# EAGLE board 00 (EAGLE 8.7.1)

Size 100 x 80 mm. Coordinates in mm from the lower left corner, seen from the top.
Outline: 0,0 100,0 100,80 0,80 0,0
Copper layers (1*16): Top 0.035mm / dielectric 1.5mm / Bottom 0.035mm
Design rules "default": minimum track width 6mil, minimum drill 0.35mm, track to track 6mil, track to pad 6mil, pad to pad 6mil, via to via 6mil, smd to smd 6mil, copper to edge 40mil, drill to drill 6mil, minimum pad ring 10mil, minimum via ring 8mil, stop-mask expansion 4mil, vias tented up to drill 0mil, thermal gap 10mil

## Footprints (pad centres in the part's own frame; a part is rotated, then mirrored left to right if it is on the bottom)
C025-025X050 = drill 0.813 octagon: 1 -1.27,0; 2 1.27,0
B45181B = drill 0.813: + -2.54,0 | drill 0.813 octagon: - 2.54,0
USB-MB-H = drill 0.8: D+ 5.1,0; D- 3.9,0.8; GND 5.1,-1.6; ID 3.9,-0.8; VBUS 5.1,1.6 | drill 1.9: P$6 0,-3.65; P$7 0,3.65
1X08 = drill 1.016 pad 1.88: 1 0,0; 2 2.54,0; 3 5.08,0; 4 7.62,0; 5 10.16,0; 6 12.7,0; 7 15.24,0; 8 17.78,0
LED3MM = drill 0.813 octagon: A -1.27,0; K 1.27,0
0207/10 = drill 0.813 octagon: 1 -5.08,0; 2 5.08,0
DIL28-3 = drill 0.813 long: 1 -16.51,-3.81; 2 -13.97,-3.81; 3 -11.43,-3.81; 4 -8.89,-3.81; 5 -6.35,-3.81; 6 -3.81,-3.81; 7 -1.27,-3.81; 8 1.27,-3.81; 9 3.81,-3.81; 10 6.35,-3.81; 11 8.89,-3.81; 12 11.43,-3.81; 13 13.97,-3.81; 14 16.51,-3.81; 15 16.51,3.81; 16 13.97,3.81; 17 11.43,3.81; 18 8.89,3.81; 19 6.35,3.81; 20 3.81,3.81; 21 1.27,3.81; 22 -1.27,3.81; 23 -3.81,3.81; 24 -6.35,3.81; 25 -8.89,3.81; 26 -11.43,3.81; 27 -13.97,3.81; 28 -16.51,3.81
SLIDE = drill 0.8: 1 -2,0; 2 0,0; 3 2,0 | drill 1: P$1 -4,0; P$2 4,0
TO92 = drill 0.813 octagon: 1 -1.27,0; 2 0,1.905; 3 1.27,0
PB = drill 1.016 pad 1.88: 1 -2.54,0; 2 2.54,0
1X05 = drill 1.016 pad 1.88: 1 0,0; 2 2.54,0; 3 5.08,0; 4 7.62,0; 5 10.16,0
OSC = drill 1.016 pad 1.88: 1 -2.54,0; 2 0,0; 3 2.54,0

## Placement (x,y rotation side)
C1  0.1uF  [C025-025X050]  -33.02,26.67 0 top  (outside the outline)
C2  0.1uF  [C025-025X050]  -39.37,26.67 0 top  (outside the outline)
C3  0.1uF  [C025-025X050]  -45.72,26.67 0 top  (outside the outline)
C4  0.1uF  [C025-025X050]  -52.07,26.67 0 top  (outside the outline)
C5  10uF  [B45181B]  -34.29,15.24 0 top  (outside the outline)
C6  10uF  [B45181B]  -46.99,15.24 0 top  (outside the outline)
J1  USB-MB-H  [USB-MB-H]  -21.59,17.78 0 top  (outside the outline)
J2  [1X08]  -52.07,48.26 0 top  (outside the outline)
J3  [1X08]  -31.75,53.34 0 top  (outside the outline)
LED1  Red  [LED3MM]  -30.48,49.53 0 top  (outside the outline)
LED2  Green  [LED3MM]  -20.32,49.53 0 top  (outside the outline)
R1  330  [0207/10]  -43.18,38.1 0 top  (outside the outline)
R2  330  [0207/10]  -19.05,43.18 0 top  (outside the outline)
R3  10K  [0207/10]  -31.75,43.18 0 top  (outside the outline)
R4  10K  [0207/10]  -44.45,43.18 0 top  (outside the outline)
U$1  PIC32MX250F128B  [DIL28-3]  -31.75,6.35 0 top  (outside the outline)
U$2  SLIDE  [SLIDE]  -24.13,25.4 0 top  (outside the outline)
U$3  MCP1702  [TO92]  -34.29,38.1 0 top  (outside the outline)
U$4  RESET  [PB]  -20.32,33.02 0 top  (outside the outline)
U$5  USER  [PB]  -31.75,33.02 0 top  (outside the outline)
U$6  PICKIT3  [1X05]  -46.99,33.02 0 top  (outside the outline)
U$7  8MHz  [OSC]  -17.78,39.37 0 top  (outside the outline)

## Library data of the parts
C1-C6 R1-R4 = resistor
J1 U$1-U$7 = ME433
J2 J3 = ME433; PROD_ID: CONN-08438
LED1 LED2 = led

## Nets
+3V3: C1.1 C2.1 C6.+ J2.2 R1.2 R3.2 R4.2 U$1.13 U$1.28 U$3.3 U$6.2
+5V: C3.1 J3.2 U$1.15 U$2.1 U$3.2
A0: J3.8 U$1.2
A1: J3.7 U$1.3
A4/LED: J3.3 R2.2 U$1.12
B2: J3.6 U$1.6
B3: J3.5 U$1.7
B4/USER: J3.4 R4.1 U$1.11 U$5.1
B7: J2.3 U$1.16
B8: J2.4 U$1.17
B9: J2.5 U$1.18
B13: J2.6 U$1.24
B14: J2.7 U$1.25
B15: J2.8 U$1.26
D+: J1.D+ U$1.21
D-: J1.D- U$1.22
GND: C1.2 C2.2 C3.2 C4.2 C5.- C6.- J1.GND J2.1 J3.1 LED1.K LED2.K U$1.8 U$1.19 U$1.27 U$4.2 U$5.2 U$6.3 U$7.2
MCLR: R3.1 U$1.1 U$4.1 U$6.1
N$1: LED2.A R2.1
N$2: J1.VBUS U$2.2
N$3: LED1.A R1.1
N$4: U$1.9 U$7.1
N$5: U$1.10 U$7.3
N$6: C5.+ U$1.20
PGC: U$1.5 U$6.5
PGD: U$1.4 U$6.4
USB3V3: U$1.23
USBID: J1.ID U$1.14

## Tracks (layer width: path | path; a pad name or v marks a point on that pad's centre or on a via)
+3V3  (10 unrouted)
+5V  (4 unrouted)
A0  (1 unrouted)
A1  (1 unrouted)
A4/LED  (2 unrouted)
B2  (1 unrouted)
B3  (1 unrouted)
B4/USER  (3 unrouted)
B7  (1 unrouted)
B8  (1 unrouted)
B9  (1 unrouted)
B13  (1 unrouted)
B14  (1 unrouted)
B15  (1 unrouted)
D+  (1 unrouted)
D-  (1 unrouted)
GND  (17 unrouted)
MCLR  (3 unrouted)
N$1  (1 unrouted)
N$2  (1 unrouted)
N$3  (1 unrouted)
N$4  (1 unrouted)
N$5  (1 unrouted)
N$6  (1 unrouted)
PGC  (1 unrouted)
PGD  (1 unrouted)
USBID  (1 unrouted)